# Altium PCB Gas_Sensor_PCB.PcbDoc
Units mil, origin at the board's own origin, x right, y up, seen from the top; angles counter-clockwise.
Board outline 3543.31 x 1377.95 mil, 2 copper layers (Top Layer, Bottom Layer); 35 components, 21 nets, 125 pads, 32 vias.
Unrouted connection lines stored in the file: 3.
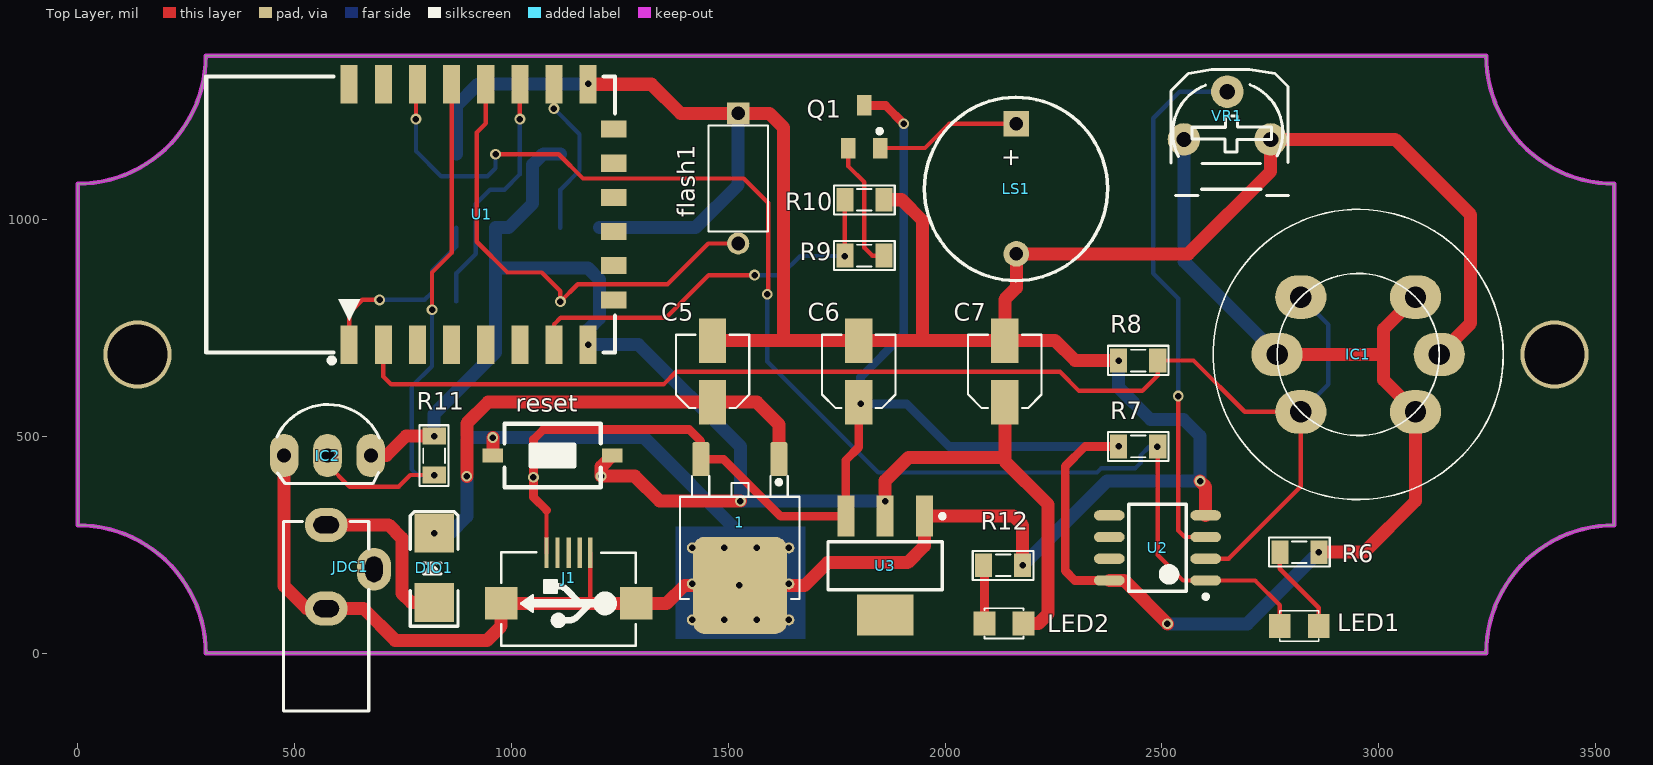
[diagram p0: Top Layer view]
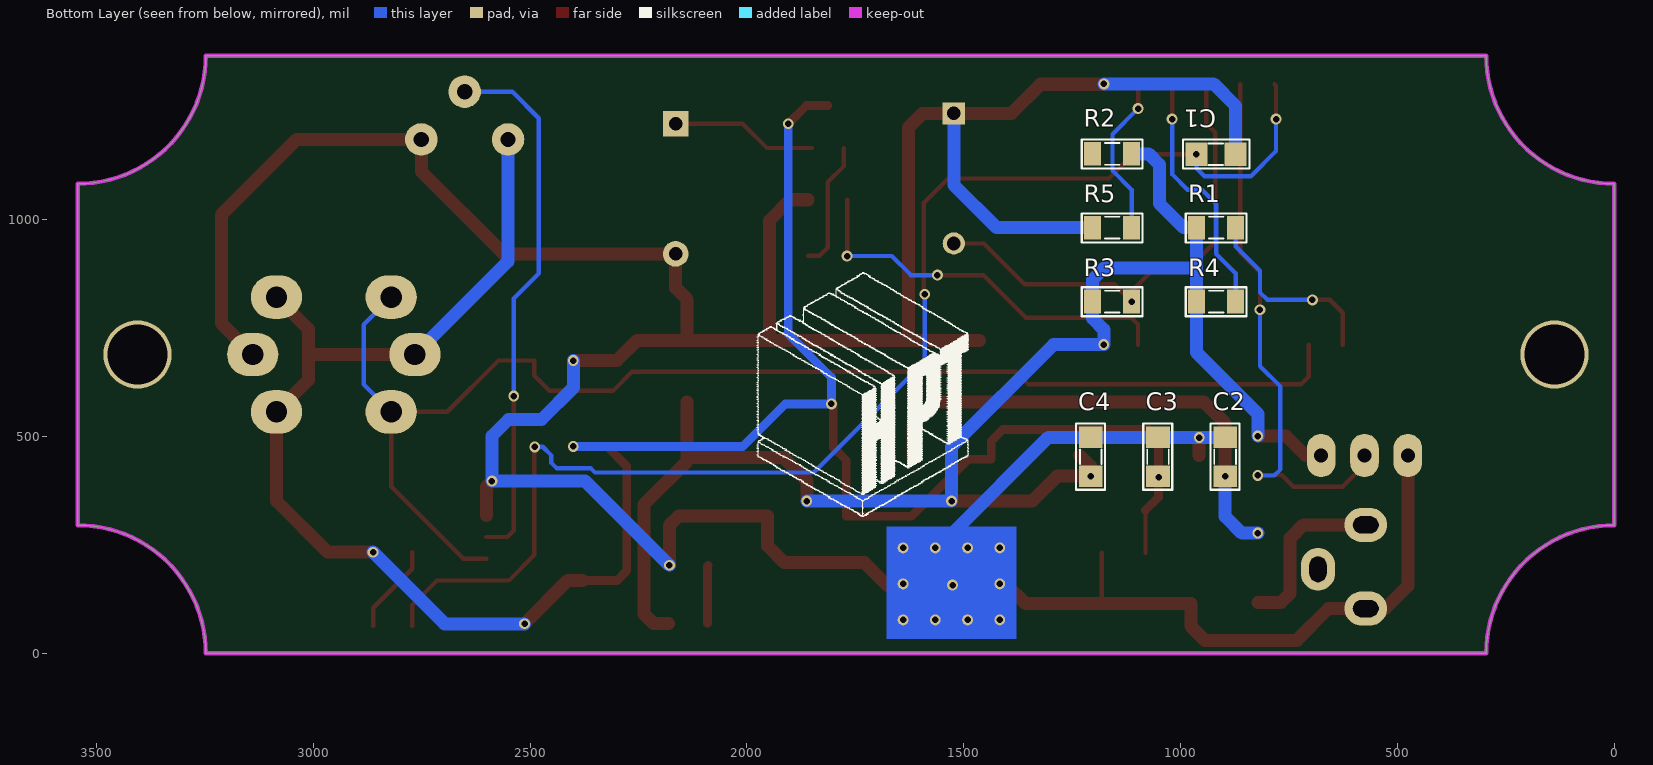
[diagram p1: Bottom Layer view, seen from below]
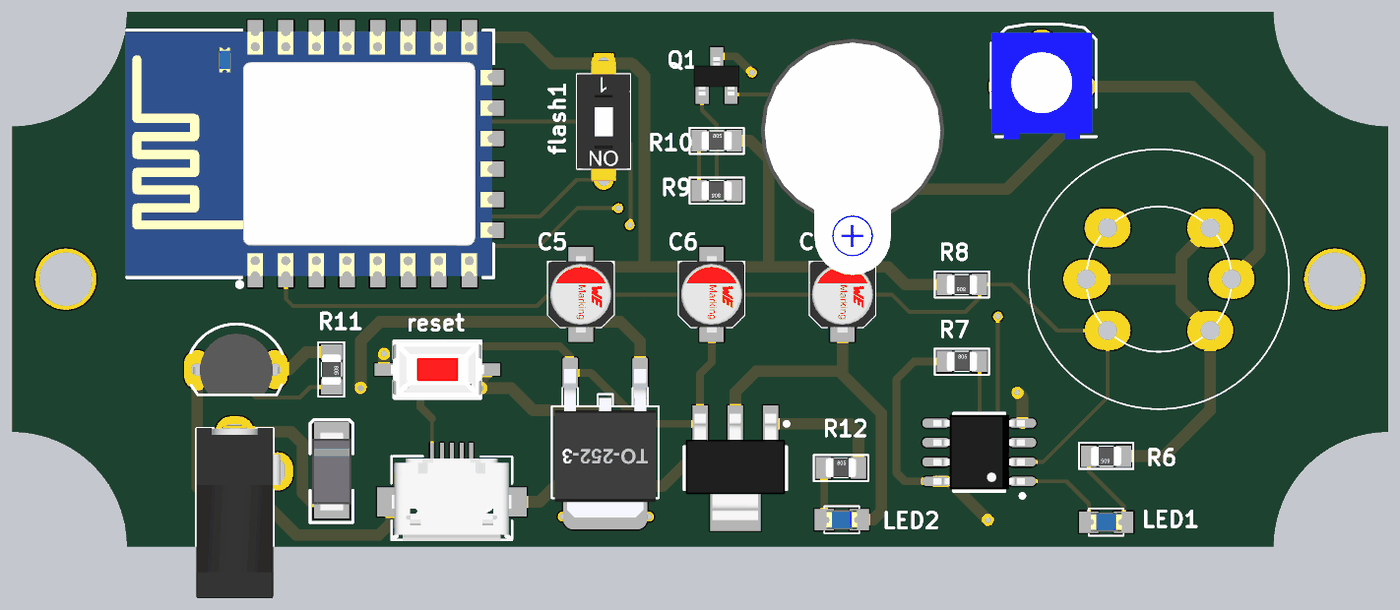
[diagram p2: 3D render of the assembled board from above, using the file's embedded part models]
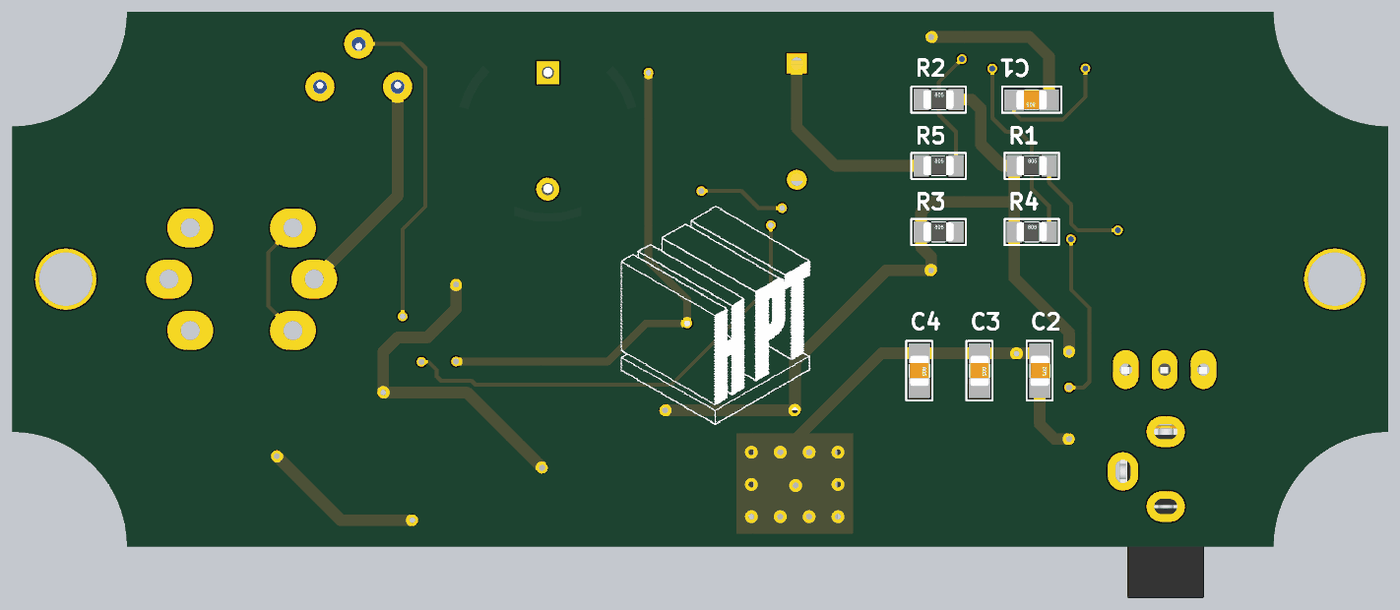
[diagram p3: 3D render of the assembled board from below, using the file's embedded part models]

## Layer stack, top to bottom
Top Solder: solder mask 0.4, Solder Resist, Dk 3.5
Top Layer: signal copper 1.4
Dielectric 1: dielectric 12.6, FR-4, Dk 4.8
Bottom Layer: signal copper 1.4
Bottom Solder: solder mask 0.4, Solder Resist, Dk 3.5

## Board outline
0,295.28 cw(c0,0) 295.28,0 3248.03,0 cw(c3543.31,0) 3543.31,295.28 3543.31,1082.68 cw(c3543.31,1377.95) 3248.03,1377.95 295.28,1377.95 cw(c0,1377.95) 0,1082.68

## Design rules (kind name [scope] priority, off if disabled: settings)
Clearance [All] p1: gap=10
PolygonConnect [All] p1: connectstyle=Relief reliefconductorwidth=10 reliefentries=4 polygonreliefangle="90 Angle" airgapwidth=10
RoomDefinition Gas_Sensor_Schematic [InComponentClass('Gas_Sensor_Schematic')] p1: confinementstyle=ConfineIn formatcopy=TRUE lockcomponents=FALSE outline 3754.13,-14 13099.13,-14 13099.13,1091 3754.13,1091
RoutingVias [All] p1: holewidth=15 width=25 viastyle="Through Hole" minholewidth=15 minwidth=25 maxholewidth=28 maxwidth=50
SolderMaskExpansion [All] p1: expansion=4
Width [All] p1: maxlimit=50 minlimit=8 preferedwidth=10
30 further rules are at their usual default settings.

## Components (designator, comment, footprint, x,y, rotation, side; value= is the part's Value field where it differs from the comment)
1 "LM78xx" TO252-123 1527,302 r180 top
C1 "104" SM-CAP-0805 873.54,1150.77 r0 bottom
C2 "104" SM-CAP-0805 897.23,498.04 r270 bottom
C3 "104" SM-CAP-0805 1052.23,498.04 r270 bottom
C4 "104" SM-CAP-0805 1207.23,498.04 r270 bottom
C5 "CN-ALU-SMD" CAP-ALU-SMD-4.5x5x1.4 1464,650 r90 top
C6 "CN-ALU-SMD" CAP-ALU-SMD-4.5x5x1.4 1801,650 r90 top
C7 "CN-ALU-SMD" CAP-ALU-SMD-4.5x5x1.4 2138,650 r90 top
DIO1 "Diode SMD" DIO-SMD-106 822,197 r270 top
flash1 "SW" SW-DIP1 1523,1095 r180 top
IC1 "MQ-2" MQ-2 2952.76,688.98 r180 top
IC2 "DS18S20" DS18S20 576,456 r0 top
J1 "USB-5" USB-M1 1132,232 r180 top
JDC1 "Jac DC" DC3 573,296 r90 top
LED1 "LED" LED-0805-Blue 2862,63 r180 top
LED2 "LED" LED-0805-Blue 2181,69 r180 top
LS1 "Speaker" SPEAKER 2164,1221 r270 top
Q1 "C1815" SOT23B 1814,1214 r0 top
R1 "10K" RES-SMD-0805 918.04,981.39 r180 bottom
R2 "1K" RES-SMD-0805 1158.04,1151.77 r180 bottom
R3 "10K" RES-SMD-0805 1158.04,811 r180 bottom
R4 "10K" RES-SMD-0805 918.04,811 r180 bottom
R5 "10K" RES-SMD-0805 1158.04,981.39 r180 bottom
R6 "10K" RES-SMD-0805 2817,233 r180 top
R7 "10K" RES-SMD-0805 2445.48,477 r0 top
R8 "1K" RES-SMD-0805 2445.48,675 r180 top
R9 "10K" RES-SMD-0805 1814,917 r180 top
R10 "10K" RES-SMD-0805 1814,1045.83 r0 top
R11 "4K7" RES-SMD-0805 822,456 r270 top
R12 "10K" RES-SMD-0805 2134,203 r0 top
reset "SW" SW1-SMD 1095,456 r0 top (schematic designator SW1)
U1 "ESP_12_E" ESP_12_E 626,697 r90 top
U2 "LM393" SO8 2490,243 r180 top
U3 "LM1117-3.3V" SOT223 1862,202 r180 top
VR1 "10K" VR 2551,1185 r0 top

## Footprints (in the part's own frame and the unit in brackets; to place one, negate y for a bottom-side part, rotate by r counter-clockwise, add the part's x,y. Pads: shape width x height; smd on the part's side, far side on the other; paste and mask are expansions set on the pad)
CAP-ALU-SMD-4.5x5x1.4 [mm]
  rect 2.6x1.6 smd: 1(-1.8,0) 2(1.8,0)
  silkscreen extent -2.15,-2.15 2.15,2.15, body extent -2.5,-2.15 2.5,2.15, height 5.45
DC3 [mm] "WR-DC_DC Power Jack_Right Angled_THT Center Pin ?1.0_Plug ID ?1.05_Plug OD ?3.5"
  oval 2x2.5 hole 1 slot 1.5 at 90 deg: 1(0,0) 2(-4.9,0)
  oval 2.5x2 hole 1 slot 1.5 at 0 deg: 3(-2.6,-2.8)
  silkscreen extent -10.9,-2.5 0.2,2.5, body extent -10.9,-3 0.4,2.5, height 7.81
DIO-SMD-106 [mil]
  rect 90x90.55 smd: 1(80,0) 2(-80,0)
  silkscreen extent -130,-55 135,55, body extent -99,-50 106,52, height 95
DS18S20 [mil] "TO-92"
  oval 66x100 hole 32: 3(100,0) 4(0,0) 5(-100,0)
  silkscreen extent -117,-65 120,118, body extent -109,-62 111,93, height 119
ESP_12_E [mm] "ESP-12 Wi-Fi Module by AI-Thinker"
  rect 2.25x1 smd: 1(0.375,0) 2(0.375,-2) 3(0.375,-4) 4(0.375,-6) 5(0.375,-8) 6(0.375,-10) 7(0.375,-12) 8(0.375,-14) 15(15.625,-14) 16(15.625,-12) 17(15.625,-10) 18(15.625,-8) 19(15.625,-6) 20(15.625,-4) 21(15.625,-2) 22(15.625,0)
  rect 1x1.5 smd: 9(3,-15.5) 10(5,-15.5) 11(7,-15.5) 12(9,-15.5) 13(11,-15.5) 14(13,-15.5)
  silkscreen extent -0.7,-15.57 16.08,8.37, body extent 0,-15.49 16,8.51, height 2.75
LED-0805-Blue [mil]
  rect 50x55 smd: 1(0,0) 2(90,0)
  silkscreen extent 0,-35 90,35, body extent 5,-25 85,25, height 43
MQ-2 [mm] "MQ-2 GAS SENSOR"
  oval 3x2.54 hole 1.25: 1(-3.359,3.359) 2(-4.75,0) 3(-3.359,-3.359) 4(3.359,-3.359) 5(4.75,0) 6(3.359,3.359)
  silkscreen extent -8.5,-8.5 8.5,8.5, body extent -8.43,-8.48 8.5,8.48, height 16.7
RES-SMD-0805 [mil]
  rect 39.37x55 smd: 1(-45,0) 2(45,0)
  silkscreen extent -70,-34 70,33, body extent -39,-25 39,25, height 31
SM-CAP-0805 [mil]
  rect 50x55 smd: 1(0,0) 2(90,0)
  silkscreen extent -32,-34 121,33, body extent 6,-25 84,25, height 31
SO8 [mm] "SOIC, 8-Leads, Body 4.9x3.9mm, Pitch 1.27mm, IPC High Density"
  oval 1.8x0.6 smd: 1(-2.825,1.905) 2(-2.825,0.635) 3(-2.825,-0.635) 4(-2.825,-1.905) 5(2.825,-1.905) 6(2.825,-0.635) 7(2.825,0.635) 8(2.825,1.905)
  silkscreen extent -2.95,-2.55 1.68,2.98, body extent -2.99,-2.45 3,2.45, height 1.6
SOT23B [mm] "SOT 23B"
  rect 0.85x1.2 smd: 1(0.94,-1.245) 2(0,1.25) 3(-0.95,-1.25)
  silkscreen extent 0.77,-0.38 1.02,-0.13, body extent -1.5,-1.3 1.5,1.2, height 1.06
SOT223 [mm]
  rect 1x2.4 smd: 1(-2.3,-2.9) 2(0,-2.9) 3(2.3,-2.9)
  rect 3.3x2.4 smd: 4(0,2.9)
  silkscreen extent -3.48,-3.02 3.35,1.4, body extent -3.25,-3.56 3.25,3.4, height 1.68
SPEAKER [mm]
  rect 1.5x1.5 hole 0.8: 1(0,0)
  round 1.5 hole 0.8: 2(7.62,0.013)
  silkscreen extent -1.55,-5.38 9.18,5.36, body extent -2.22,-6 13.24,6, height 4.5
SW1-SMD [mm]
  rect 1.2x0.8 smd: 1(-3.5,0) 2(3.5,0)
  silkscreen extent -2.82,-1.85 2.82,1.85, body extent -3.05,-1.85 3.05,1.85, height 2.5
SW-DIP1 [mm]
  rect 1.3x1.3 hole 0.8: 1(0,-3.81)
  round 1.3 hole 0.8: 2(0,3.81)
  silkscreen extent -1.74,-3.1 1.74,3.1, body extent -1.74,-3.98 1.74,3.89, height 3.95
TO252-123 [mm]
  round 0.5 on Mech15: 0(0,0)
  rrect25% 1x2 smd: 1(-2.285,-3.7) 3(2.285,-3.7)
  rrect25% 5.5x5.7 smd: 2(0,3.7)
  silkscreen extent -3.5,-2.7 3.5,4.5, body extent -3.3,-3.95 3.3,5.76, height 2.31
USB-M1 [mil]
  rect 10x70 smd: 1(51.18,0) 2(25.59,0) 3(0,0) 4(-25.59,0) 5(-50,0)
  rect 74.8x74.8 smd: 5(-155.51,116.84) 5(155.51,116.84)
  silkscreen extent -155,-1 155,215, body extent -157,5 158,218, height 107
VR [mil] "Resistor Variable"
  round 75 hole 35: 1(0,0) 2(100,110) 3(200,0)
  silkscreen extent -30,-129 241,161, body extent -30,-135 230,140, height 177

## Part data
1: "Positive Voltage Regulator"
C1 C2 C3 C4: library part CN
C5 C6 C7: "Polarized Capacitor (Axial)"
DIO1: "Default Diode"
flash1 reset: library part SW2, "Switch button 2 pin"
IC1: "MQ-2 GAS SENSOR"
IC2: "High Precision  1-Wire® Digital Thermometer"
JDC1: library part DCIN, "Jac DC input"
LED1 LED2: library part "LED SMD"
LS1: "Loudspeaker"
Q1: "NPN 600mW, ECB"
R1 R2 R3 R4 R5 R6 R7 R8 R9 R10 R11 R12: library part Res-SMD, "Resistor"
U1: "ESP-12 Wi-Fi Module by AI-Thinker"
U2: "IC DUAL COMPARATOR"
U3: library part LM1117, "800mA Low-Dropout Linear Regulator"
VR1: library part VR, "Var Resistor"

## Free pads (board coordinates)
  round 157.48 hole 137.8: 1(137.8,688.98) 4(3405.51,688.98)
  round 25 hole 15: 5(1417,243) 6(1491.33,243) 7(1565.67,243) 8(1640,243) 9(1640,160) 10(1640,77) 11(1565.67,77) 12(1491.33,77) 13(1417,77) 14(1417,160)

## Via types
v1: diameter 25, hole 15, Top Layer to Bottom Layer, 32 vias

## Nets (pads, with @x,y where several pads share a name; then routed paths per layer and width w, separated by ;. In a path a pad name is that pad's centre, name@x,y a point inside that pad or via, vN(x,y) a via of type N, cw(c..) or ccw(c..) an arc to the next point about the centre after c; other vN are vias at no path point)
3.3V: C4.2 C7.1 IC2.3 LED2.1 R1.1 R2.2 R3.1 R4.1 R11.1 reset.2 U1.8 U3.2 | length 3640.7
  Top Layer w30: IC2.3 712,456 757,501 v1(822,501) ; reset.2 1207,430.2 v1(1207,408.27) 1284.73,408.27 1342,351 v1(1528,351) ; v1(1862,351) 1862,398 1916,452 2138,452 ; C7.1 2138,443 2238,343 2238,91 2216,69 LED2.1
  Bottom Layer w30: v1(822,501) 822,552 963.04,693.04 R4.1 963.04,888 ; R2.2 1073.77,1151.77 1049,1127 1049,1037 993.39,981.39 R1.1 963.04,888 ; v1(1862,351) v1(1528,351) 1528,477 1293.24,711.76 v1(1177.18,711.76) 1177.18,746.18 1203.04,772.04 R3.1 1203.04,861.96 1177,888 963.04,888
5V: 1.3 C3.2 C6.1 IC1.1 IC1.3 IC1.5 J1.1 Q1.2 R6.1 R7.1 U2.8 U3.3 VR1.1 | length 5534.2
  Top Layer w10: J1.1 1080.82,330.18
  Top Layer w20: 1080.82,330.18 1051,360 v1(1051,406) 1051,493 1074,516 1410,516 1437.04,488.96 1.3 1489.33,447.67 1620.83,316.17 U3.3 1771.45,445.45 1801,475 C6.1@1801,575 ; Q1.2 1862.79,1263.21 v1(1905,1221) ; U2.8 2299,168 2277,190 2277,431 2323,477 v1(2400.48,477)
  Top Layer w30: U2.8 2413,168 v1(2513,68) ; IC1.5 3011,688.98 ; v1(2862,233) 2967,233 3084.99,350.99 IC1.1 3011,630.73 3011,688.98 ; IC1.3 3011,747.22 3011,688.98
  Bottom Layer w20: v1(1905,1221) 1905,736 1805.13,636.13 v1(1805.13,575) 1912,575 2010,477 v1(2400.48,477)
  Bottom Layer w30: v1(2513,68) 2697,68 v1(2862,233) ; VR1.1 2551,903.72 IC1.5
12V: DIO1.1 JDC1.1 | length 397.5
  Top Layer w30: JDC1.1 717,296 747.61,265.39 747.61,138.39 769,117 DIO1.1
ADC: IC1.4 IC1.6 R8.1 U1.2 U2.2 | length 3102.8
  Top Layer w10: U1.2 704.74,638.26 723,620 1351,620 1380,649 2265,649 2309,605 2455,605 2490.49,640.49 R8.1 2573,675 2691.26,556.74 IC1.6 2820.52,384.52 2654,218 U2.2
  Bottom Layer w10: IC1.6 2884,620.22 2884,757.73 IC1.4
DC: C1.2 LED1.2 R7.2 U1.20 U2.1 | length 3111.4
  Top Layer w10: v1(780,1232) 780,1308.68 U1.20 ; v1(963.54,1150.77) 1109.23,1150.77 1165,1095 1536,1095 1592,1039 1592,830 v1(1590,828) ; R7.2@2490.48,476 2490.48,226.52 2549,168 U2.1 2715,168 2772,111 LED1.2
  Bottom Layer w10: v1(780,1232) 780,1158 838,1100 945,1100 963.54,1118.54 v1(963.54,1150.77) ; v1(1590,828) 1590,673 1846,417 2350.57,417 2360.57,427 2439,427 2451,439 2451,456 2471,476 v1(2489.48,476)
DQ: IC2.4 R11.2 U1.19 | length 1283.5
  Top Layer w10: IC2.4 576,435 627,384 740,384 767,411 R11.2 ; v1(817,792) 817,878 862.22,923.22 U1.19
  Bottom Layer w10: v1(817,792) 817,662 770,615 770,424 784,410 v1(822,410)
GND: 1.2 C1.1 C2.1 C3.1 C4.1 C5.2 C6.2 C7.2 flash1.1 IC1.2 IC2.5 J1.5 JDC1.2 LS1.2 pad.5 pad.6 pad.7 pad.8 pad.9 pad.10 pad.11 pad.12 pad.13 pad.14 R5.1 R8.2 R10.2 R12.2 reset.1 U1.15 U2.4 U3.1 VR1.3 | length 9437.3
  Top Layer w10: 1182,117.16 J1.5@1182,232
  Top Layer w30: IC2.5 476,155 527.91,103.09 JDC1.2 658.91,103.09 732,30 944,30 976.49,62.49 976.49,115.16 1287.51,115.16 1358.16,115.16 1399.33,156.33 1.2@1526,156.33 ; reset.1 v1(957.2,497.2) ; U1.15 1322.84,1312.16 1390,1245 flash1.1 1595,1245 1628,1212 1628,720.87 ; C5.2 1628,720.87 ; 1.2 1676.33,156.33 1729,209 1914,209 1952.55,247.55 U3.1 2157.83,316.17 2179,295 v1(2179,203) ; R10.2 1900.17,1045.83 1948,998 1948,720.87 ; v1(2400.49,675) 2300,675 2254.13,720.87 C7.2 ; v1(2588,397) 2601.22,383.78 U2.4 ; IC1.2 3212,761.21 3212,1011 3038,1185 VR1.3 2751,1111 2561,921 LS1.2 2164.5,842.5 2138,816 C7.2 ; 1628,720.87 C6.2 1948,720.87 ; 1948,720.87 C7.2
  Bottom Layer w30: C1.1 873.54,1262.54 924,1313 v1(1177,1313) ; C2.1 C3.1 C4.1 1304.96,498.04 1526,277 v1(1526,157.33) ; R5.1 1424.39,981.39 1523,1080 flash1.1 ; v1(2179,203) 2373,397 v1(2588,397) 2588,501 2550,539 2474,539 2400.49,612.51 v1(2400.49,675)
LOA: R9.2 R10.1 U1.7 | length 911.3
  Top Layer w10: U1.7 1098.44,758.44 1114,774 1357,774 1455,872 v1(1561,872) ; R9.2 R10.1
  Bottom Layer w10: v1(1561,872) 1622,872 1666,916 v1(1769,916)
Net1_1: 1.1 C2.2 C5.1 DIO1.2 | length 1147.6
  Top Layer w30: v1(897.23,408.04) 897.23,530.23 946.13,579.13 C5.1 1565.87,579.13 1616.96,528.04 1.1
  Bottom Layer w30: v1(822,277) 859,277 897.23,315.23 v1(897.23,408.04)
Netflash1_2: flash1.2 R3.2 U1.18 | length 1101.5
  Top Layer w10: U1.18 940.96,1221.96 920,1201 920,949 991,878 1070,878 1113.04,834.96 v1(1113.04,811) 1153.04,851 1360,851 1454,945 flash1.2
NetLED1_1: LED1.1 R6.2 | length 207.3
  Top Layer w10: R6.2 2772,195 2862,105 LED1.1
NetLED2_2: LED2.2 R12.1 | length 134.8
  Top Layer w20: R12.1 2091,201 LED2.2
NetLS1_1: LS1.1 Q1.1 | length 336.2
  Top Layer w10: Q1.1 1954,1165 2010,1221 LS1.1
NetQ1_3: Q1.3 R9.1 | length 297.7
  Top Layer w10: Q1.3 1776.6,1123.4 1814,1086 1814,935 1832,917 R9.1
NetR1_2: R1.2 U1.1 | length 456.3
  Top Layer w10: U1.1 626,785 656,815 v1(696,815)
  Bottom Layer w10: v1(696,815) 800,815 817,832 817,882 873.04,938.04 R1.2
NetR2_1: R2.1 U1.3
NetR4_2: R4.2 U1.17 | length 581.2
  Top Layer w10: v1(1019.7,1231.7) U1.17
  Bottom Layer w10: R4.2 873.04,876.04 918,921 918,1036 951,1069 984,1069 1019,1104 1019,1231 v1(1019.7,1231.7)
NetR5_2: R5.2 U1.16 | length 373.6
  Top Layer w10: v1(1098,1256) 1098,1311.72 U1.16
  Bottom Layer w10: v1(1098,1256) 1157,1197 1157,1113 1113.04,1069.04 R5.2
NetU2_3: U2.3 VR1.2 | length 1240.7
  Top Layer w10: v1(2538,593) 2538,283 2553,268 U2.3
  Bottom Layer w10: v1(2538,593) 2538,818 2480,876 2480,1234 2541,1295 VR1.2
RX: J1.2 U1.22
TX: J1.3 U1.21
pads on no net: 1.0 J1.4 JDC1.3 U1.4 U1.5 U1.6 U1.9 U1.10 U1.11 U1.12 U1.13 U1.14 U2.5 U2.6 U2.7 U3.4

## Keep-outs
Keep-Out Layer:
  the board outline again, w10

## Other copper
Bottom Layer:
  rectangle net GND: 1378,33 1678,292

## Silkscreen, mask and mechanical layers (free items; w line width, h text height)
Bottom Overlay:
  drawing of 2330 lines, arcs and shapes, not listed

## Text inside footprints (layer, text, board x,y; h text height)
LS1: Top Overlay "+" at 2136,1165.5 h40 r270
U1: Mechanical 13 "ANTENNA AREA" at 316,702 h10 r90; Mechanical 13 "CUTOUT POLYGON" at 336,702 h10 r90